# Altium PCB sensor_flex_v2-1023.PcbDoc
Units mil, origin at the board's own origin, x right, y up, seen from the top; angles counter-clockwise.
Board outline 6000 x 990 mil, 2 copper layers (Top Layer, Bottom Layer); 1 components, 1 nets, 16 pads, 0 vias.
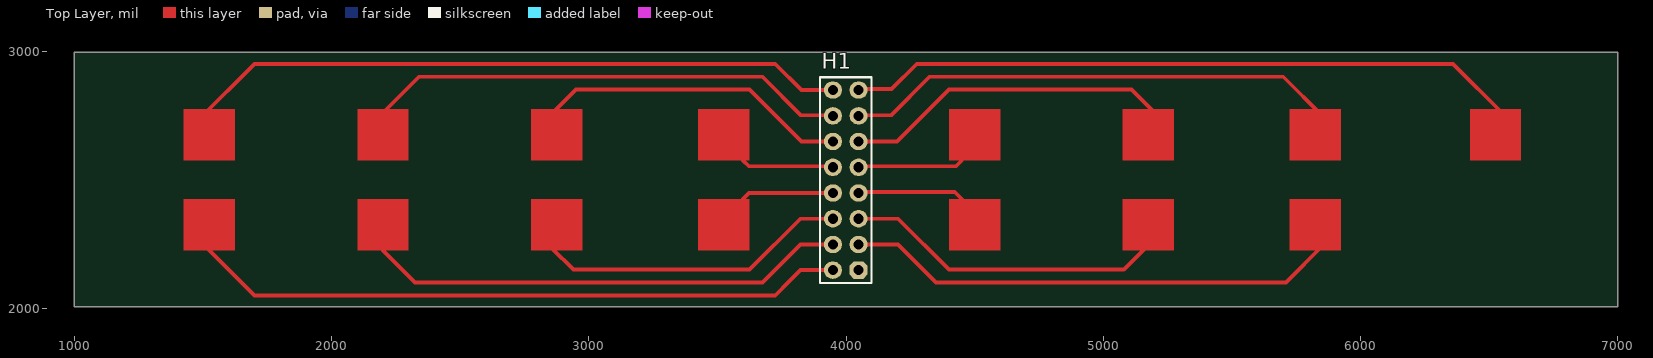
[diagram p0: Top Layer view]
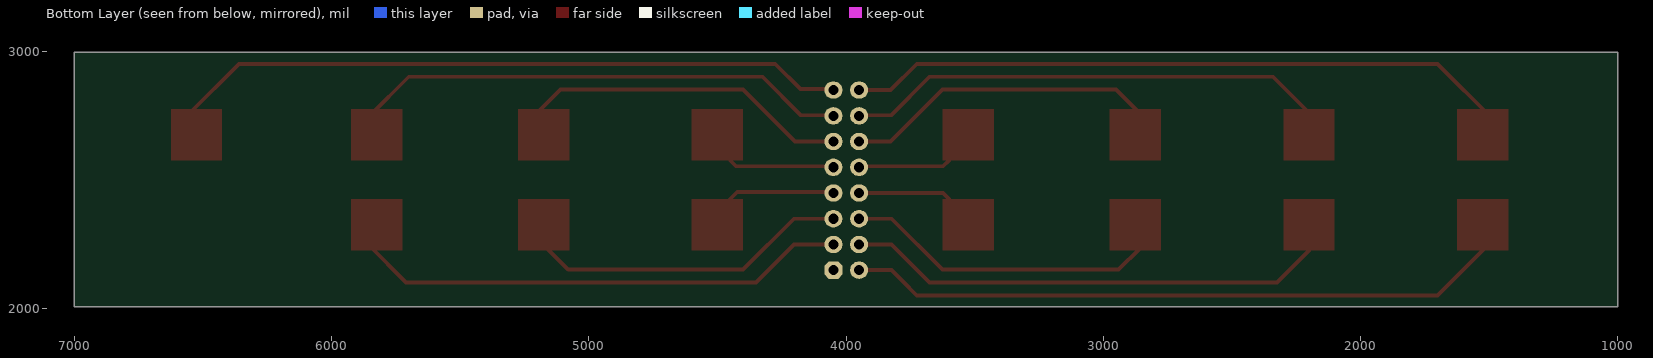
[diagram p1: Bottom Layer view, seen from below]

## Layer stack, top to bottom
Top Solder: solder mask 0.4, Solder Resist, Dk 3.5
Top Layer: signal copper 1.4
Dielectric 1: dielectric 12.6, FR-4, Dk 4.8
Bottom Layer: signal copper 1.4
Bottom Solder: solder mask 0.4, Solder Resist, Dk 3.5

## Board outline
1000,2005 7000,2005 7000,2995 1000,2995
board region "Default Layer Stack Region": 6994.13,2995 7000,2995 7000,2005 6991,2005
board region "Default Layer Stack Region": 6991,2005 1005,2005 1004.91,2995 6994.13,2995
board region "Default Layer Stack Region": 1005,2005 1000,2005 1000,2995 1004.91,2995

## Design rules (kind name [scope] priority, off if disabled: settings)
Clearance [All] p1: gap=10 ignorepadtopadclearanceinfootprint=FALSE except(0: Arc-Hole Track-Hole SMDPad-Hole THPad-Hole Via-Hole Fill-Hole Poly-Hole Region-Hole Text-Hole)
PolygonConnect [All] p1: connectstyle=Relief reliefconductorwidth=10 reliefentries=4 polygonreliefangle="90 Angle" airgapwidth=10
RoutingVias [All] p1: holewidth=28 width=50 viastyle="Through Hole" minholewidth=28 minwidth=50 maxholewidth=28 maxwidth=50
SolderMaskExpansion [All] p1: expansion=4
Width [All] p1: maxlimit=15 minlimit=10 preferedwidth=15
30 further rules are at their usual default settings.

## Components (designator, comment, footprint, x,y, rotation, side; value= is the part's Value field where it differs from the comment)
H1 "HEADER" HD_male_8x2_100mil_straight 3999,2498 r90 top

## Footprints (in the part's own frame and the unit in brackets; to place one, negate y for a bottom-side part, rotate by r counter-clockwise, add the part's x,y. Pads: shape width x height; smd on the part's side, far side on the other; paste and mask are expansions set on the pad)
HD_male_8x2_100mil_straight [mm]
  oct 1.7x1.8 hole 1: 1(-8.89,-1.27)
  oval 1.7x1.8 hole 1: 2(-8.89,1.27) 3(-6.35,-1.27) 4(-6.35,1.27) 5(-3.81,-1.27) 6(-3.81,1.27) 7(-1.27,-1.27) 8(-1.27,1.27) 9(1.27,-1.27) 10(1.27,1.27) 11(3.81,-1.27) 12(3.81,1.27) 13(6.35,-1.27) 14(6.35,1.27) 15(8.89,-1.27) 16(8.89,1.27)
  Mechanical 15 keep-out lines w0.1: -10.16,2.54 -10.16,-2.54 10.16,-2.54 10.16,2.54 -10.16,2.54
  silkscreen extent -10.16,-2.54 10.16,2.54, body extent -10.16,-2.54 10.16,2.54, height 8

## Part data
H1: library part HD_8x2, "Header, 8-pins/row, double row,"

## Nets (pads, with @x,y where several pads share a name; then routed paths per layer and width w, separated by ;. In a path a pad name is that pad's centre, name@x,y a point inside that pad or via, vN(x,y) a via of type N, cw(c..) or ccw(c..) an arc to the next point about the centre after c; other vN are vias at no path point)
GND: H1.1
pads on no net: H1.2 H1.3 H1.4 H1.5 H1.6 H1.7 H1.8 H1.9 H1.10 H1.11 H1.12 H1.13 H1.14 H1.15 H1.16
copper on no net: | length 21919.6
  Top Layer w10: 4049,2852 4052,2852
  Top Layer w15: 1487.5,2737.5 1700,2950 3725,2950 3827,2848 3949,2848 ; 1512.5,2237.5 1700,2050 3725,2050 3779,2104 3823,2148 3949,2148 ; 2195,2755 2340,2900 3675,2900 3825,2750 3940,2750 ; 2200,2250 2200,2225 2325,2100 3675,2100 3823,2248 3949,2248 ; 2850,2750 2905,2805 2950,2850 3625,2850 3827,2648 3949,2648 ; 2857.5,2232.5 2940,2150 3625,2150 3823,2348 3882,2348 3949,2348 ; 3600,2425 3623,2448 3808.75,2448 3902.25,2448 3949,2448 ; 3600,2575 3623,2552 3949,2552 ; 4049,2248 4202,2248 4350,2100 5710,2100 5855,2245 ; 4049,2348 4202,2348 4400,2150 5080,2150 5177.5,2247.5 ; 4049,2452 4258,2452 4423,2452 4475,2400 ; 4049,2552 4427,2552 4450,2575 ; 4049,2648 4198,2648 4400,2850 5110,2850 5205,2755 ; 4049,2852 4177,2852 4275,2950 6360,2950 6555,2755 ; 4050,2750 4175,2750 4325,2900 5700,2900 5850,2750

## Other copper
Top Layer:
  rectangle: 6425,2575 6625,2775
  rectangle: 5725,2575 5925,2775
  rectangle: 5075,2225 5275,2425
  rectangle: 5075,2575 5275,2775
  rectangle: 4400,2225 4600,2425
  rectangle: 4400,2575 4600,2775
  rectangle: 5725,2225 5925,2425
  rectangle: 3425,2225 3625,2425
  rectangle: 3425,2575 3625,2775
  rectangle: 2775,2225 2975,2425
  rectangle: 2775,2575 2975,2775
  rectangle: 2100,2225 2300,2425
  rectangle: 2100,2575 2300,2775
  rectangle: 1425,2225 1625,2425
  rectangle: 1425,2575 1625,2775